# Altium PCB breakout_pcb.PcbDoc
Units mm, origin at the board's own origin, x right, y up, seen from the top; angles counter-clockwise.
Board outline 33.53 x 22.1 mm, 2 copper layers (Top Layer, Bottom Layer); 3 components, 17 nets, 76 pads, 17 vias.
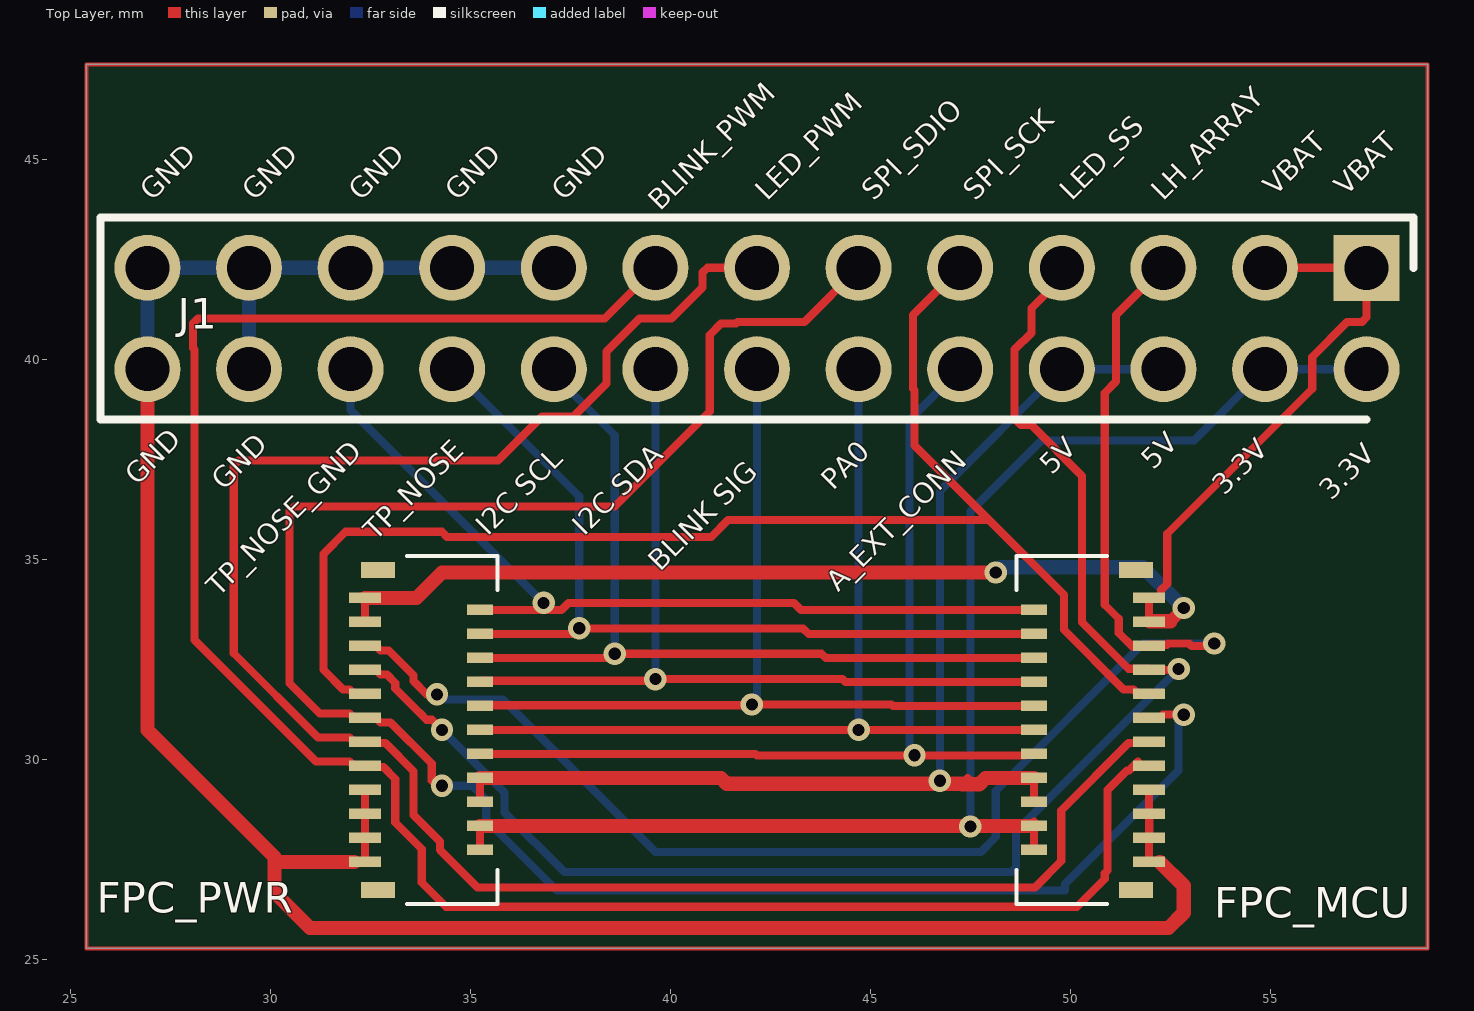
[diagram p0: Top Layer view]
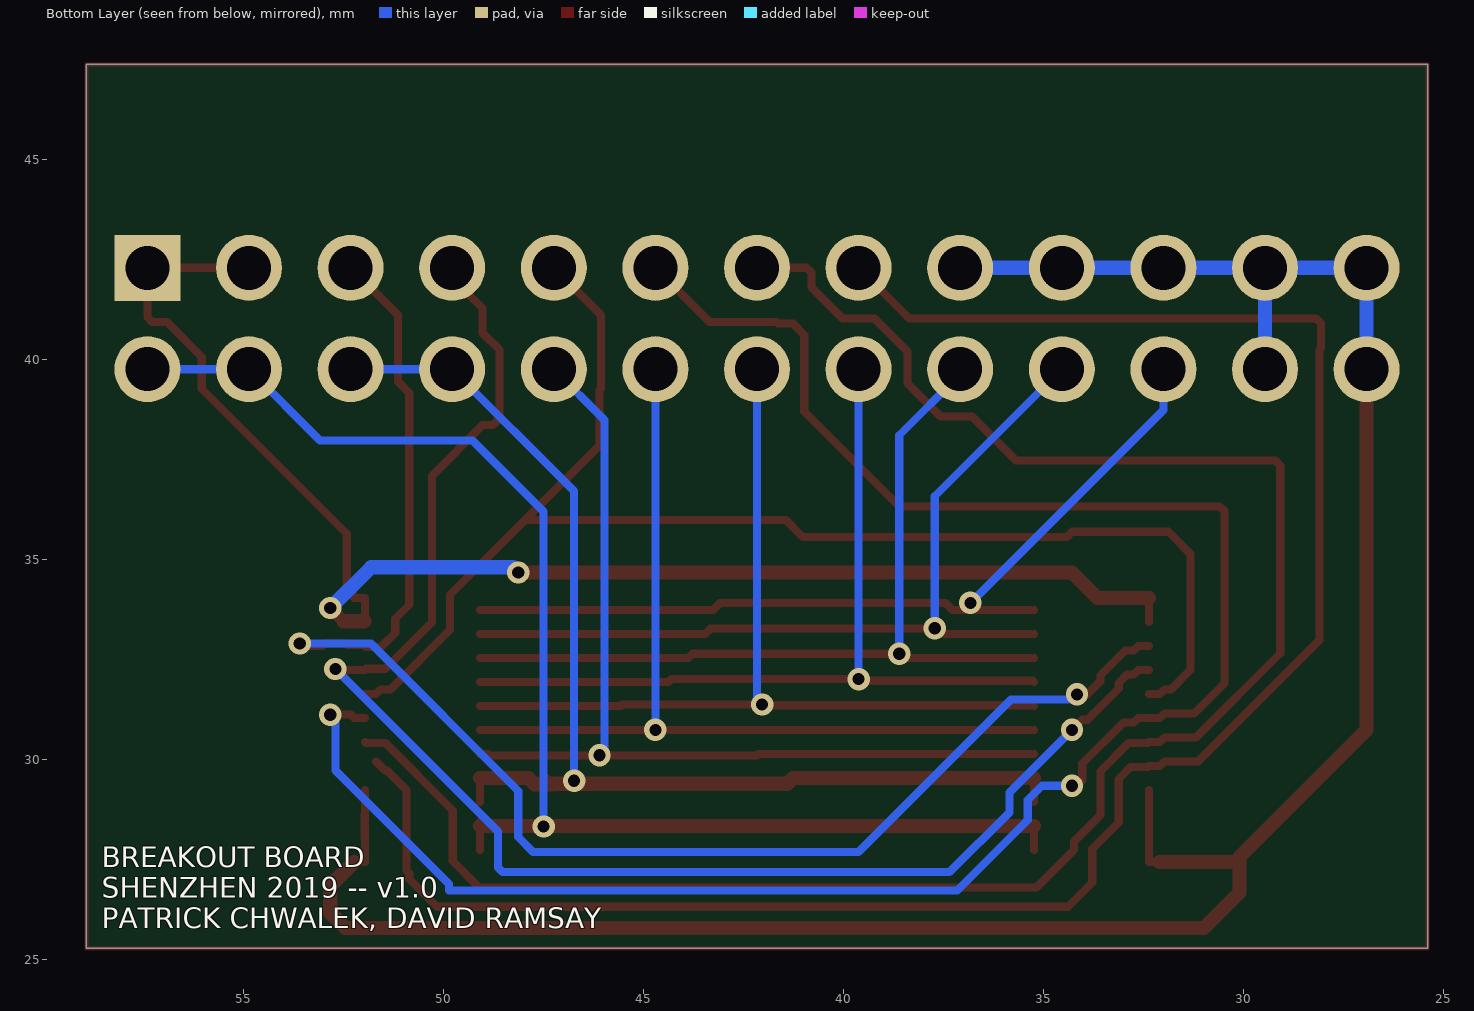
[diagram p1: Bottom Layer view, seen from below]
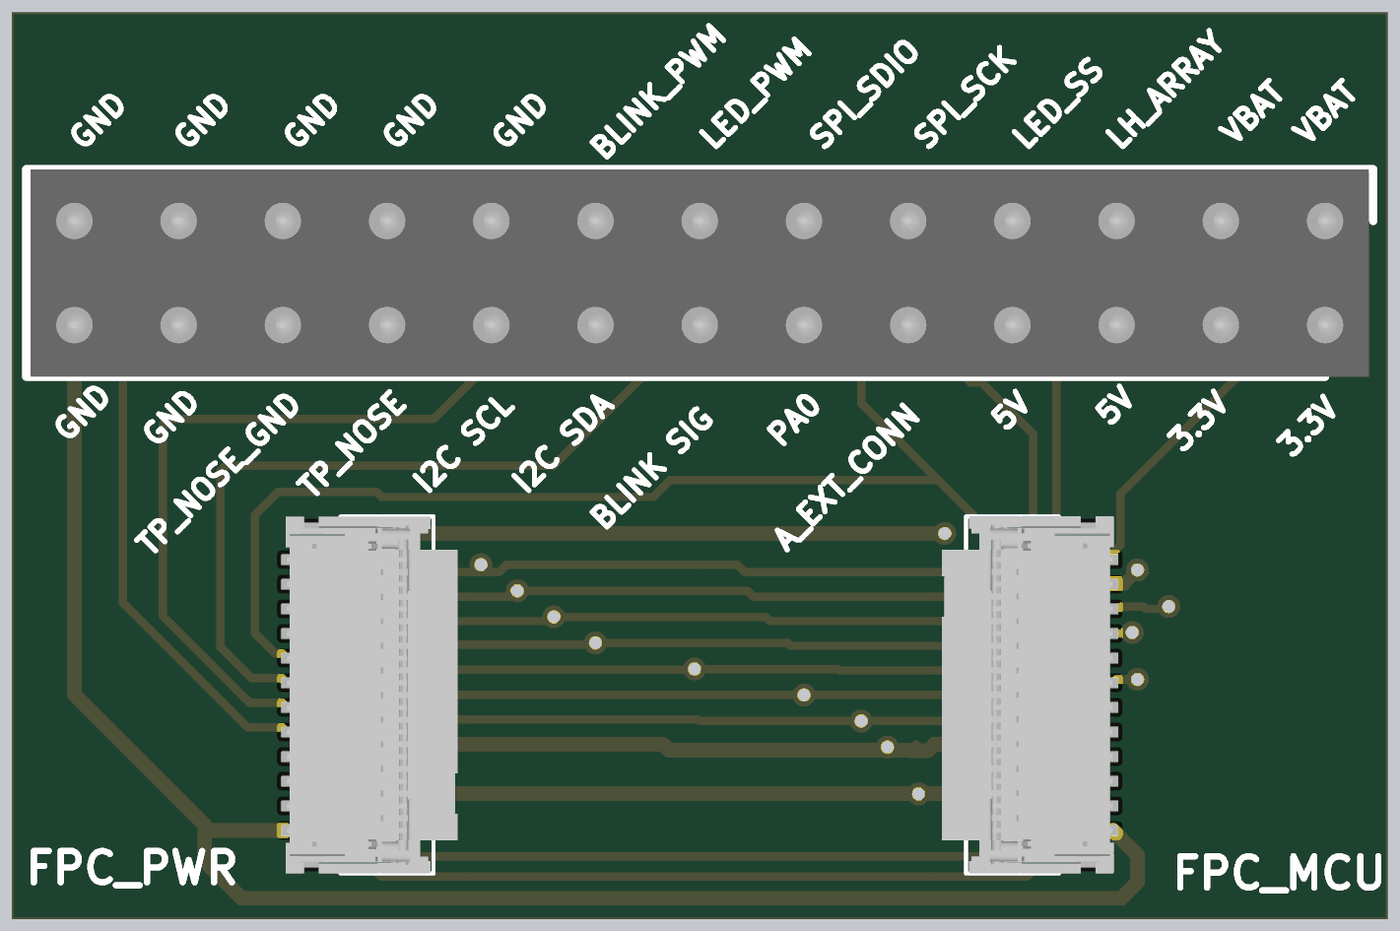
[diagram p2: 3D render of the assembled board from above, using the file's embedded part models]

## Layer stack, top to bottom
Top Solder: solder mask 0.0102, Solder Resist, Dk 3.5
Top Layer: signal copper 0.0356
Dielectric 1: dielectric 0.32, FR-4, Dk 4.8
Bottom Layer: signal copper 0.0356
Bottom Solder: solder mask 0.0102, Solder Resist, Dk 3.5

## Board outline
25.4,25.273 25.4,47.371 58.928,47.371 58.928,25.273

## Design rules (kind name [scope] priority, off if disabled: settings)
Clearance [All] p1: gap=0.254 ignorepadtopadclearanceinfootprint=FALSE except(0: Arc-Hole Track-Hole SMDPad-Hole THPad-Hole Via-Hole Fill-Hole Poly-Hole Region-Hole Text-Hole)
PolygonConnect [All] p1: connectstyle=Relief reliefconductorwidth=0.254 reliefentries=4 polygonreliefangle="90 Angle" airgapwidth=0.254
RoutingVias [All] p1: holewidth=0.305 width=0.559 viastyle="Through Hole" minholewidth=0.305 minwidth=0.559 maxholewidth=0.711 maxwidth=1.27
SolderMaskExpansion [All] p1: expansion=0.102
Width [All] p1: maxlimit=0.457 minlimit=0.203 preferedwidth=0.203 minimp=50.000000 maximp=50.000000 favimp=50.000000
30 further rules are at their usual default settings.

## Components (designator, comment, footprint, x,y, rotation, side; value= is the part's Value field where it differs from the comment)
FPC_MCU "502250-2391" 5022502391 50.419,30.734 r90 top
FPC_PWR "502250-2391" 5022502391 33.909,30.734 r270 top
J1 "1-103542-2" HDRV26W89P254X254_2X13_3261X506X1074P 57.404,42.288 r180 top

## Footprints (in the part's own frame and the unit in brackets; to place one, negate y for a bottom-side part, rotate by r counter-clockwise, add the part's x,y. Pads: shape width x height; smd on the part's side, far side on the other; paste and mask are expansions set on the pad)
5022502391 [mm]
  rect 0.26x0.8 smd: 1(-3.3,-1.545) 3(-2.7,-1.545) 5(-2.1,-1.545) 7(-1.5,-1.545) 9(-0.9,-1.545) 11(-0.3,-1.545) 13(0.3,-1.545) 15(0.9,-1.545) 17(1.5,-1.545) 19(2.1,-1.545) 21(2.7,-1.545) 23(3.3,-1.545)
  rect 0.26x0.65 smd: 2(-3,1.33) 4(-2.4,1.33) 6(-1.8,1.33) 8(-1.2,1.33) 10(-0.6,1.33) 12(0,1.33) 14(0.6,1.33) 16(1.2,1.33) 18(1.8,1.33) 20(2.4,1.33) 22(3,1.33)
  rect 0.4x0.85 smd: MP1(-4,-1.22) MP2(4,-1.22)
  silkscreen extent -4.35,-0.5 4.35,1.77, body extent -4.35,-1.84 4.35,2.35, height 0.9
HDRV26W89P254X254_2X13_3261X506X1074P [mm]
  rect 1.65x1.65 hole 1.1: 1(0,0)
  round 1.65 hole 1.1: 2(0,2.537) 3(2.54,0) 4(2.54,2.537) 5(5.08,0) 6(5.08,2.537) 7(7.62,0) 8(7.62,2.537) 9(10.16,0) 10(10.16,2.537) 11(12.7,0) 12(12.7,2.537) 13(15.24,0) 14(15.24,2.537) 15(17.78,0) 16(17.78,2.537) 17(20.32,0) 18(20.32,2.537) 19(22.86,0) 20(22.86,2.537) 21(25.4,0) 22(25.4,2.537) 23(27.94,0) 24(27.94,2.537) 25(30.48,0) 26(30.48,2.537)
  silkscreen extent -1.17,-1.26 31.65,3.8, body extent -1.07,-1.26 31.55,3.8, height 10.74

## Part data
FPC_MCU FPC_PWR: "Connector", Manufacturer_Name=Molex, Mouser Part Number=538-502250-2391, Datasheet Link=https://www.molex.com/pdm_docs/sd/5022501791_sd.pdf, Height=1.85mm, Manufacturer_Part_Number=502250-2391, Mouser Price/Stock=https://www.mouser.com/Search/Refine.aspx?Keyword=538-502250-2391, System=Connector
J1: "Connector", Manufacturer_Name="TE Connectivity", Mouser Part Number=571-1-103542-2, Datasheet Link=http://www.te.com/commerce/DocumentDelivery/DDEController?Action=showdoc&DocId=Customer+Drawing%7F103542%7FJ3%7Fpdf%7FEnglish%7FENG_CD_103542_J3.pdf%7F1-103542-2, Height=10.744mm, Manufacturer_Part_Number=1-103542-2, Mouser Price/Stock=https://www.mouser.com/Search/Refine.aspx?Keyword=571-1-103542-2

## Via types
v1: diameter 0.559, hole 0.305, Top Layer to Bottom Layer, tented both sides, 17 vias

## Nets (pads, with @x,y where several pads share a name; then routed paths per layer and width w, separated by ;. In a path a pad name is that pad's centre, name@x,y a point inside that pad or via, vN(x,y) a via of type N, cw(c..) or ccw(c..) an arc to the next point about the centre after c; other vN are vias at no path point)
3.3V: FPC_MCU.2 FPC_MCU.4 FPC_PWR.20 FPC_PWR.22 J1.2 J1.4 | length 34.6
  Top Layer w0.203: FPC_PWR.22 FPC_PWR.20 ; FPC_MCU.2 FPC_MCU.4 FPC_MCU.4@49.089,28.448 ; J1.2@57.257,39.604 J1.2
  Top Layer w0.356: FPC_PWR.20 FPC_MCU.4
  Bottom Layer w0.203: v1(47.498,28.321) 47.498,36.195 49.276,37.973 53.086,37.973 J1.4 J1.2
5V: FPC_MCU.6 FPC_MCU.8 FPC_PWR.16 FPC_PWR.18 J1.6 J1.8 | length 30.1
  Top Layer w0.203: FPC_PWR.18 FPC_PWR.16 ; v1(46.736,29.464) 47.501,29.464 47.431,29.534 ; FPC_MCU.6 FPC_MCU.8
  Top Layer w0.356: FPC_PWR.16 41.262,29.534 41.408,29.388 47.285,29.388 47.297,29.376 47.719,29.376 47.877,29.534 FPC_MCU.8
  Bottom Layer w0.203: v1(46.736,29.464) 46.736,36.703 J1.8 J1.6
ANALOG_EXP_CONN: FPC_MCU.10 FPC_PWR.14 J1.10 | length 24.1
  Top Layer w0.203: FPC_PWR.14 42.129,30.134 42.164,30.099 v1(46.101,30.099) 48.859,30.099 48.894,30.134 FPC_MCU.10
  Bottom Layer w0.203: v1(46.101,30.099) 45.974,30.226 45.974,38.481 J1.10
BLINK_PWM: FPC_MCU.9 FPC_PWR.15 J1.15 | length 50.3
  Top Layer w0.203: J1.15 38.357,41.021 28.186,41.021 28.067,40.902 28.067,40.278 28.105,40.24 28.105,32.982 31.139,29.948 31.98,29.948 32.094,29.834 FPC_PWR.15 32.392,29.806 32.825,29.806 33.12,29.511 33.12,28.416 33.782,27.754 33.782,26.924 34.392,26.314 50.165,26.314 50.858,27.008 50.858,27.15 50.927,27.218 50.927,29.23 51.417,29.72 51.46,29.72 FPC_MCU.9@51.689,29.948
BLINK_SIG: FPC_MCU.14 FPC_PWR.10 J1.14 | length 22.3
  Top Layer w0.203: FPC_PWR.10 35.257,31.351 42.019,31.351 42.037,31.334 42.072,31.369 45.53,31.369 45.565,31.334 FPC_MCU.14
  Bottom Layer w0.203: v1(42.037,31.369) 42.164,31.496 J1.14
GND: FPC_MCU.1 FPC_MCU.3 FPC_MCU.5 FPC_MCU.7 FPC_PWR.17 FPC_PWR.19 FPC_PWR.21 FPC_PWR.23 J1.17 J1.19 J1.21 J1.23 J1.24 J1.25 J1.26 | length 60.4
  Top Layer w0.203: FPC_PWR.23@32.094,27.434 FPC_PWR.23 FPC_PWR.21 FPC_PWR.19 FPC_PWR.17 ; FPC_MCU.7 FPC_MCU.5 51.972,28.626 51.972,28.042 FPC_MCU.3 FPC_MCU.1 FPC_MCU.1@52.234,27.434
  Top Layer w0.356: J1.26 26.924,30.734 30.099,27.559 ; FPC_PWR.23@32.094,27.434 30.099,27.434 30.099,26.67 30.988,25.781 52.451,25.781 52.832,26.162 52.832,26.836 FPC_MCU.1@52.234,27.434
  Bottom Layer w0.356: J1.26 J1.25 J1.23 ; J1.24 J1.23 ; J1.17 J1.19 J1.21 J1.23
I2C1_SCL: FPC_MCU.18 FPC_PWR.6 J1.18 | length 21.7
  Top Layer w0.203: FPC_PWR.6 38.407,32.534 38.444,32.571 38.549,32.571 38.608,32.512 38.735,32.639 43.781,32.639 43.886,32.534 FPC_MCU.18
  Bottom Layer w0.203: J1.18 37.084,39.624 38.608,38.1 v1(38.608,32.639)
I2C1_SDA: FPC_MCU.16 FPC_PWR.8 J1.16 | length 21.8
  Top Layer w0.203: FPC_PWR.8 35.267,31.962 39.596,31.962 39.624,31.934 39.694,32.004 44.306,32.004 44.376,31.934 FPC_MCU.16
  Bottom Layer w0.203: v1@39.624,31.877 v1(39.624,32.004) J1.16
LED_PWM: FPC_MCU.11 FPC_PWR.13 J1.13 | length 48.8
  Top Layer w0.203: J1.13 40.924,42.288 40.805,42.169 40.805,41.799 40.025,41.019 39.223,41.019 38.398,40.195 38.398,39.395 37.573,38.57 36.792,38.57 35.687,37.465 29.202,37.465 29.083,37.346 29.083,32.651 31.185,30.548 31.98,30.548 32.094,30.434 FPC_PWR.13 32.392,30.406 32.872,30.406 33.577,29.701 33.577,28.605 34.239,27.943 34.239,27.737 35.179,26.797 49.11,26.797 49.77,27.457 49.77,28.719 51.456,30.406 51.936,30.406 FPC_MCU.11
LED_SS: FPC_MCU.17 FPC_PWR.7 J1.7 | length 38.6
  Top Layer w0.203: FPC_PWR.7 32.634,32.234 32.748,32.12 32.911,32.12 33.12,31.911 33.12,31.766 33.72,31.166 33.722,31.166 33.9,30.988 34.043,30.988 34.29,30.741 v1(34.29,30.734) ; J1.7 49.784,42.037 49.022,41.275 49.022,40.659 48.603,40.24 48.603,38.519 48.768,38.354 49.022,38.354 50.292,37.084 50.292,33.427 51.456,32.262 51.936,32.262 FPC_MCU.17 52.681,32.234 v1(52.705,32.258)
  Bottom Layer w0.203: v1(34.29,30.734) 35.853,29.171 35.853,28.672 37.347,27.178 48.522,27.178 48.641,27.297 48.641,28.194 v1(52.705,32.258)
LH_DIODE_ARRAY: FPC_MCU.19 FPC_PWR.5 J1.5 | length 38.7
  Top Layer w0.203: FPC_PWR.5 32.634,32.834 32.748,32.72 32.958,32.72 33.577,32.101 33.577,31.955 33.909,31.623 v1(34.163,31.623) ; FPC_MCU.19 51.936,32.806 51.559,32.806 51.208,33.157 51.208,33.512 50.858,33.862 50.858,39.156 51.143,39.441 51.143,41.107 J1.5 ; FPC_MCU.19@51.992,32.862 52.411,32.862 52.442,32.893 52.968,32.893 53.027,32.834 53.535,32.834 v1(53.594,32.893)
  Bottom Layer w0.203: v1(34.163,31.623) 34.259,31.623 34.386,31.496 35.814,31.496 39.624,27.686 47.761,27.686 48.133,28.058 48.133,29.21 51.816,32.893 v1(53.594,32.893)
PA0: FPC_MCU.12 FPC_PWR.12 J1.12 | length 22.9
  Top Layer w0.203: FPC_PWR.12 v1(44.704,30.734) FPC_MCU.12
  Bottom Layer w0.203: v1(44.704,30.734) J1.12
SPI_SCK: FPC_MCU.15 FPC_PWR.9 J1.9 | length 35.2
  Top Layer w0.203: FPC_PWR.9 32.094,31.634 31.98,31.748 31.817,31.748 31.326,32.239 31.326,35.136 31.877,35.687 34.29,35.687 34.417,35.56 41.021,35.56 41.44,35.979 47.968,35.979 ; J1.9 46.063,41.107 46.063,39.262 46.101,39.224 46.101,37.846 47.968,35.979 ; FPC_MCU.15 51.694,31.634 51.58,31.748 51.324,31.748 49.835,33.237 49.835,34.112 47.968,35.979
SPI_SDIO: FPC_MCU.13 FPC_PWR.11 J1.11 | length 50.8
  Top Layer w0.203: v1(34.29,29.337) 34.163,29.337 34.034,29.466 34.034,29.89 33.004,30.92 32.748,30.92 32.634,31.034 FPC_PWR.11 32.094,31.034 31.98,31.148 31.232,31.148 30.48,31.9 30.48,36.203 30.599,36.322 38.608,36.322 40.983,38.697 40.983,40.61 41.267,40.894 41.637,40.894 41.675,40.932 43.348,40.932 J1.11 ; FPC_MCU.13 52.234,31.034 52.315,31.115 v1(52.832,31.115)
  Bottom Layer w0.203: v1(34.29,29.337) 35.04,29.337 35.395,28.982 35.395,28.483 37.158,26.721 49.868,26.721 49.868,26.881 52.705,29.718 52.705,30.996 52.824,31.115 v1(52.832,31.115)
TP_NOSE: FPC_MCU.20 FPC_PWR.4 J1.20 | length 21.8
  Top Layer w0.203: FPC_PWR.4 37.592,33.134 37.655,33.197 37.719,33.261 v1(37.719,33.274) ; v1@37.719,33.134 37.859,33.274 43.319,33.274 43.459,33.134 FPC_MCU.20
  Bottom Layer w0.203: J1.20 37.719,36.576 v1(37.719,33.274)
TP_NOSE_GND: FPC_MCU.22 FPC_PWR.2 J1.22 | length 22
  Top Layer w0.203: FPC_PWR.2 v1@36.83,33.734 ; v1(36.83,33.909) v1@36.83,33.734 ; FPC_MCU.22 43.262,33.734 43.087,33.909 37.456,33.909 37.281,33.734 v1@36.83,33.734
  Bottom Layer w0.203: J1.22 32.004,38.735 v1(36.83,33.909)
VBAT: FPC_MCU.21 FPC_MCU.23 FPC_PWR.1 FPC_PWR.3 J1.1 J1.3 | length 36.8
  Top Layer w0.203: FPC_PWR.3 FPC_PWR.1 ; FPC_MCU.21@51.981,33.451 FPC_MCU.21 FPC_MCU.23 52.234,34.034 52.262,34.062 52.262,34.229 52.42,34.387 52.42,35.637 56.045,39.262 56.045,40.061 56.915,40.932 57.285,40.932 57.404,41.051 J1.1 J1.3
  Top Layer w0.305: 52.501,33.451 v1(52.832,33.782)
  Top Layer w0.356: FPC_PWR.1 33.653,34.034 34.29,34.671 v1(48.133,34.671) ; FPC_MCU.21@51.981,33.451 52.501,33.451
  Bottom Layer w0.356: v1(48.133,34.671) 48.26,34.798 51.816,34.798 v1(52.832,33.782)
pads on no net: FPC_MCU.MP1 FPC_MCU.MP2 FPC_PWR.MP1 FPC_PWR.MP2
copper on no net: | length 111.3
  Top Layer w0.1: 25.4,25.273 58.928,25.273 58.928,43.942 58.928,47.371 52.768,47.371 50.546,47.371 48.514,47.371 25.4,47.371 25.4,43.942 25.4,25.273

## Silkscreen, mask and mechanical layers (free items; w line width, h text height)
Top Overlay:
  text "VBAT" at 55.118,44.069 h0.51 r45
  text "VBAT" at 56.896,44.069 h0.51 r45
  text "GND" at 27.051,43.942 h0.51 r45
  text "GND" at 29.591,43.942 h0.51 r45
  text "GND" at 32.258,43.942 h0.51 r45
  text "GND" at 34.671,43.942 h0.51 r45
  text "GND" at 37.338,43.942 h0.51 r45
  text "LED_PWM" at 42.418,43.942 h0.51 r45
  text "SPI_SDIO" at 45.085,43.942 h0.51 r45
  text "SPI_SCK" at 47.625,43.942 h0.51 r45
  text "LED_SS" at 50.038,43.942 h0.51 r45
  text "LH_ARRAY" at 52.324,43.942 h0.51 r45
  text "BLINK_PWM" at 39.751,43.688 h0.51 r45
  text "5V" at 52.07,37.211 h0.51 r45
  text "5V" at 49.53,37.084 h0.51 r45
  text "GND" at 26.67,36.83 h0.51 r45
  text "GND" at 28.829,36.703 h0.51 r45
  text "PA0" at 44.069,36.703 h0.51 r45
  text "3.3V" at 53.848,36.576 h0.51 r45
  text "3.3V" at 56.515,36.449 h0.51 r45
  text "I2C SCL" at 35.433,35.56 h0.51 r45
  text "I2C SDA" at 37.846,35.56 h0.51 r45
  text "TP_NOSE" at 32.639,35.433 h0.51 r45
  text "BLINK SIG" at 39.751,34.671 h0.51 r45
  text "A_EXT_CONN" at 44.196,34.163 h0.51 r45
  text "TP_NOSE_GND" at 28.702,34.036 h0.51 r45
Bottom Overlay:
  text "BREAKOUT BOARD / SHENZHEN 2019 -- v1.0 / PATRICK CHWALEK, DAVID RAMSAY" at 58.547,25.781 h0.51
Mechanical BS:
  the board outline again, w0.005